# Altium PCB PCB1.PcbDoc (part 5 of 12)
Units mm, origin at the board's own origin, x right, y up, seen from the top; angles counter-clockwise.
Board outline 100 x 100 mm, 6 copper layers (Top Layer, Int1 (GND), Int2 (Sign), Int3 (Sign), Int4 (PWR), Bottom Layer), stack 1.538 mm thick; 614 components, 712 nets, 3014 pads, 1096 vias.
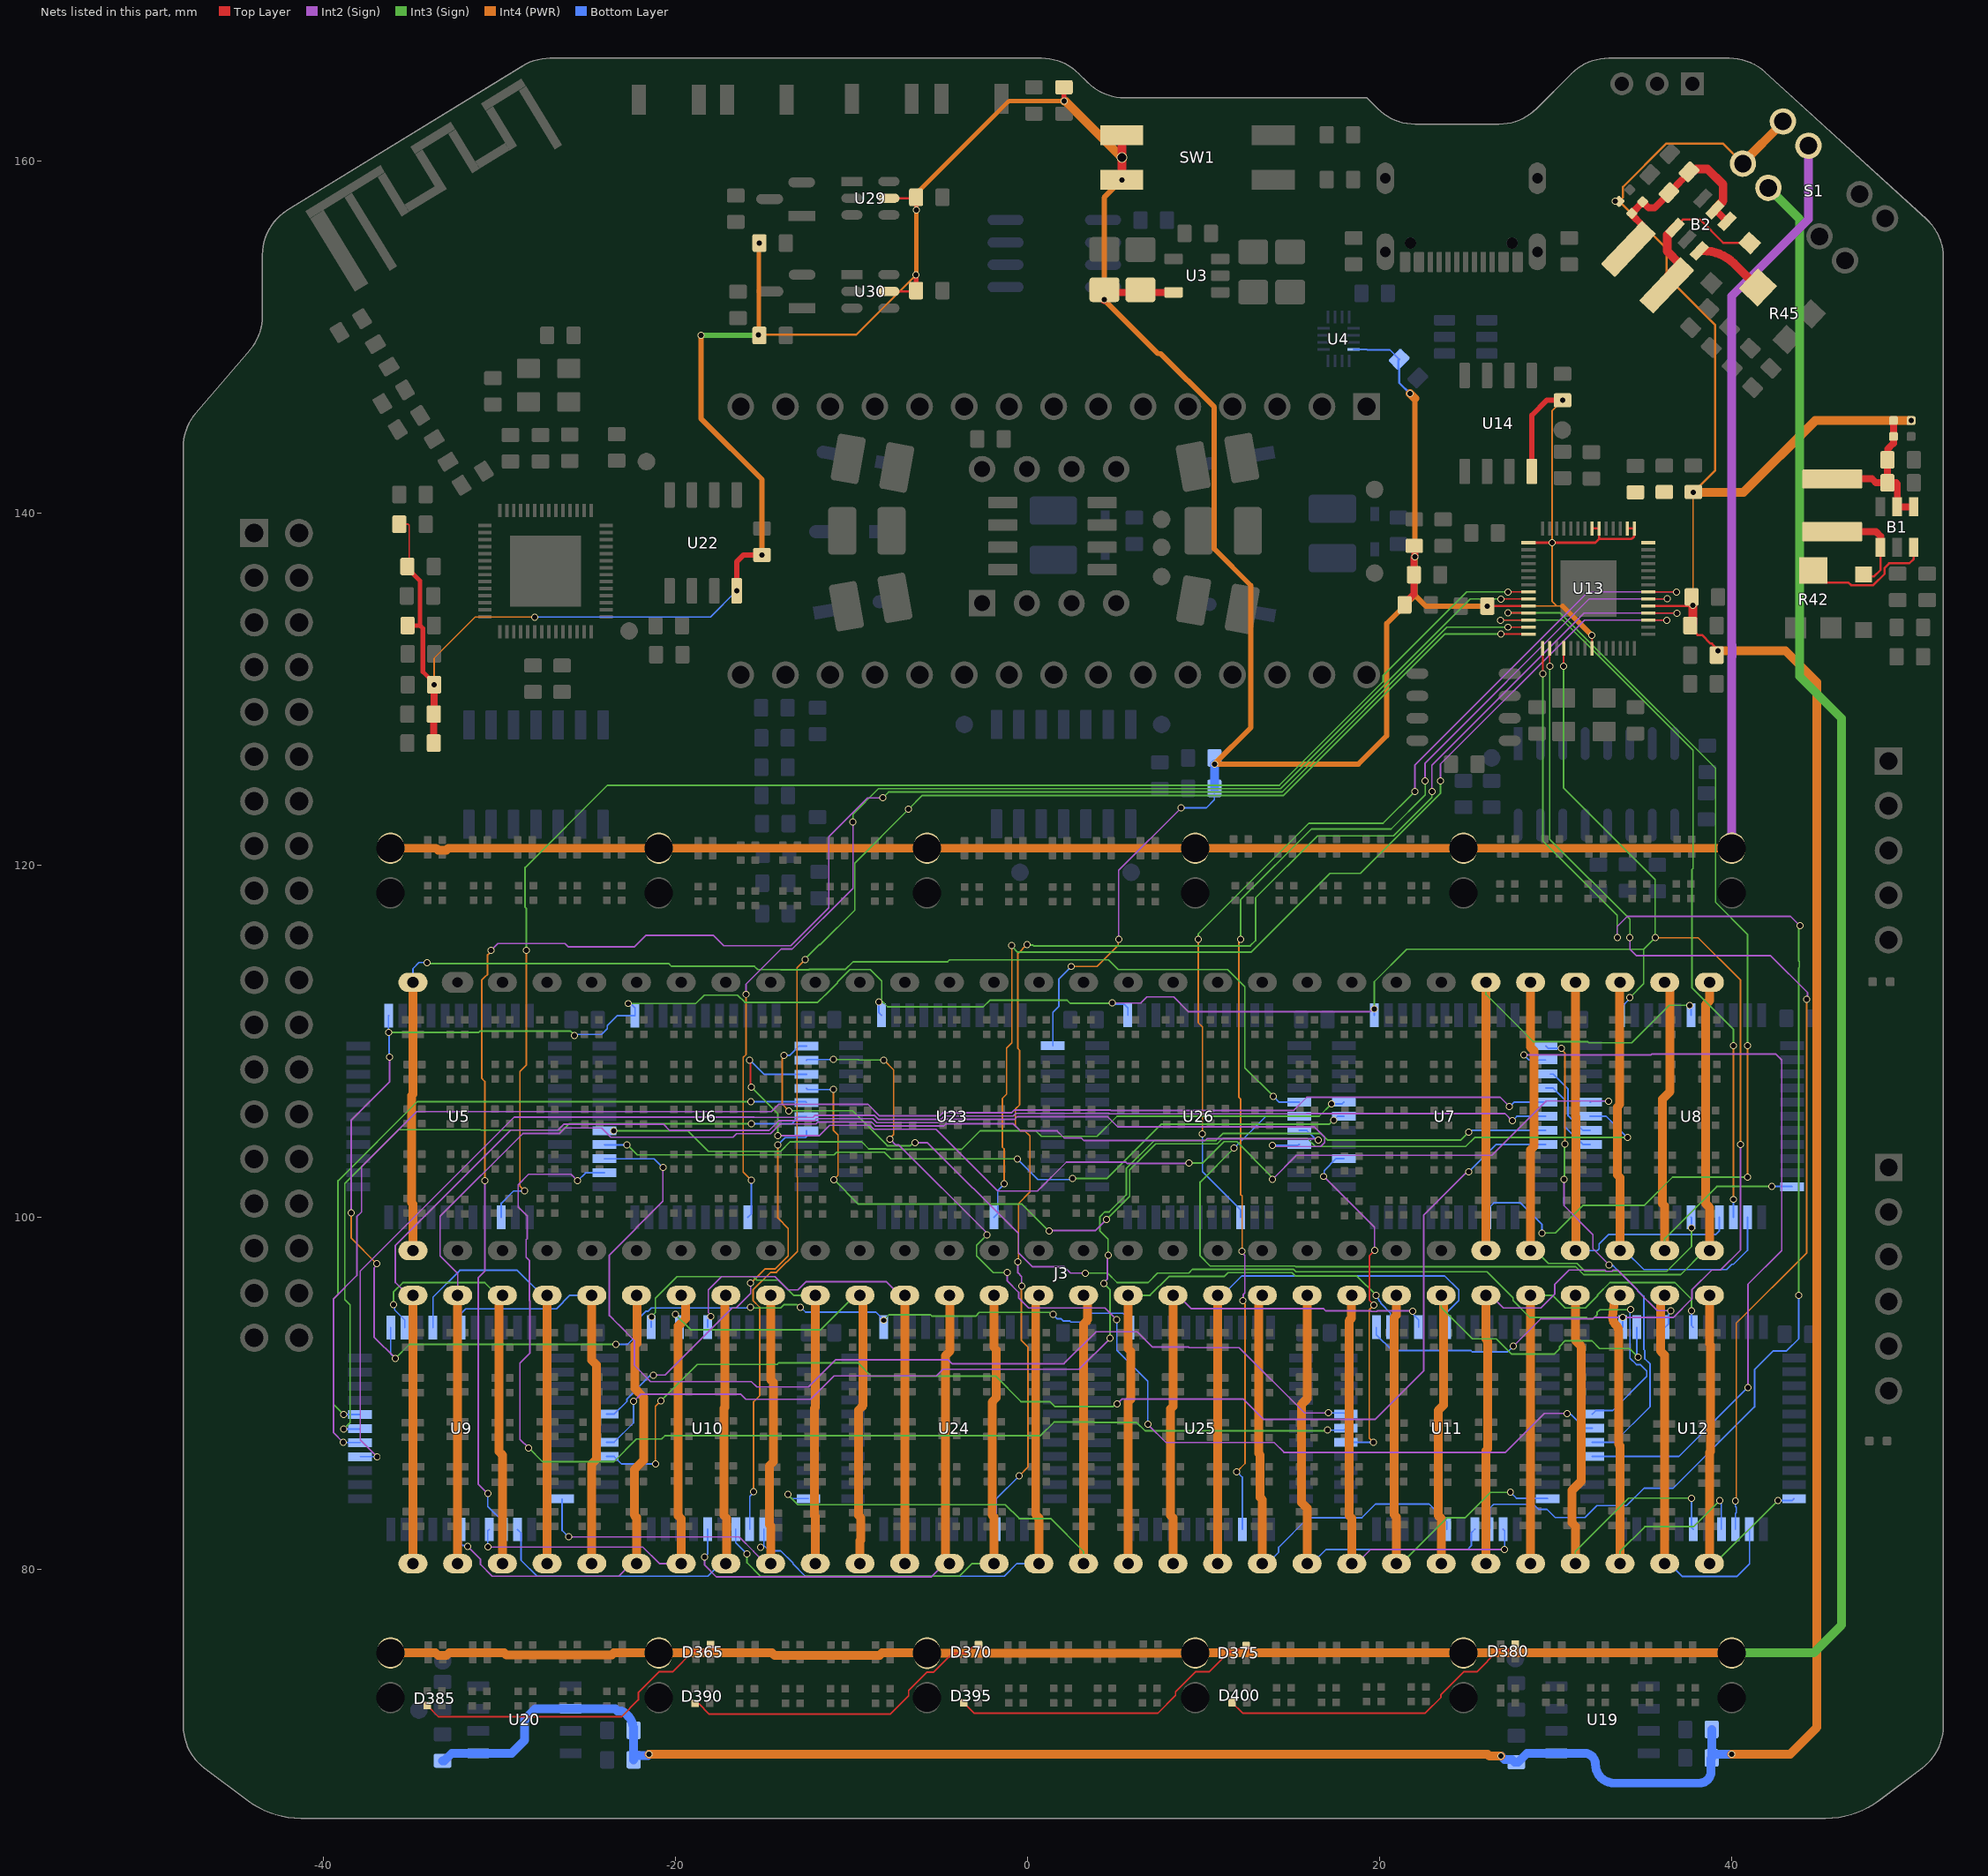
[diagram p8: the nets of this part, all layers, seen from the top]

## Via types
v1: diameter 0.4, hole 0.3, Top Layer to Bottom Layer, tented both sides, 1087 vias
v2: diameter 0.4, hole 0.3, Top Layer to Bottom Layer, 6 vias
v3: diameter 0.4, hole 0.3, Top Layer to Bottom Layer, tented top, 2 vias
v4: diameter 0.6, hole 0.5, Top Layer to Bottom Layer, 1 vias

## Nets (pads, with @x,y where several pads share a name; then routed paths per layer and width w, separated by ;. In a path a pad name is that pad's centre, name@x,y a point inside that pad or via, vN(x,y) a via of type N, cw(c..) or ccw(c..) an arc to the next point about the centre after c; other vN are vias at no path point) (continued)
B_B25: J3.25 U8.39 | length 30.1
  Int3 (Sign) w0.09: J3.25@26.028,113.356 26.028,112.671 28.714,109.984 31.814,109.984 31.877,109.922 34.307,109.922 36.437,112.051 v1(37.615,112.051)
  Int4 (PWR) w0.5: J3.25@26.028,98.116 J3.25@26.028,113.356
  Bottom Layer w0.09: v1(37.615,112.051) 37.687,111.979 U8.39@37.687,111.483
B_B26: J3.26 U8.17 | length 27.3
  Int3 (Sign) w0.09: J3.26@28.568,98.116 28.843,98.116 29.568,97.391 31.212,97.391 31.663,96.94 36.308,96.94 37.71,98.342 v1(37.71,99.407)
  Int4 (PWR) w0.5: J3.26@28.568,98.116 28.568,103.833 28.767,104.032 28.767,109.472 28.568,109.672 J3.26@28.568,113.356
  Bottom Layer w0.09: U8.17@37.687,100.013 37.71,99.99 v1(37.71,99.407)
B_B27: J3.27 U8.15 | length 24.9
  Int4 (PWR) w0.5: J3.27@31.108,98.116 31.134,98.143 31.134,105.723 31.108,105.749 J3.27@31.108,113.356
  Bottom Layer w0.09: J3.27@31.108,98.116 32.352,98.116 32.461,98.225 32.461,98.494 33.002,99.035 39.105,99.035 39.287,99.217 U8.15@39.287,100.013
B_B28: J3.28 U8.13 | length 25.4
  Int4 (PWR) w0.5: J3.28@33.648,98.116 33.648,102.26 33.493,102.415 33.493,106.281 33.626,106.415 33.626,113.334 J3.28@33.648,113.356
  Bottom Layer w0.09: J3.28@33.648,98.116 33.923,98.116 35.003,97.035 39.701,97.035 40.001,97.335 40.094,97.335 40.887,98.128 U8.13@40.887,100.013
B_B29: J3.29 U8.11 | length 24.8
  Int3 (Sign) w0.09: J3.29@36.188,98.116 36.188,98.801 39.144,101.757 v1(42.277,101.757)
  Int4 (PWR) w0.5: J3.29@36.188,98.116 36.188,100.65 36.062,100.776 36.062,106.715 36.487,107.14 36.487,113.079 36.21,113.356 J3.29@36.188,113.356
  Bottom Layer w0.09: v1(42.277,101.757) 43.412,101.757 U8.11@43.422,101.748
B_B33: J3.33 U9.35 | length 24.4
  Int3 (Sign) w0.09: v1(-36.03,95.04) -36.03,95.774 -35.506,96.298 -30.849,96.298 -30.127,95.576 J3.33@-29.852,95.576
  Int4 (PWR) w0.5: J3.33@-29.852,80.336 -29.852,86.506 -30.048,86.702 -30.048,95.38 J3.33@-29.852,95.576
  Bottom Layer w0.09: v1(-36.03,95.04) -35.971,94.981 -35.971,94.743 -35.395,94.168 U9.35@-35.395,93.743
B_B34: J3.34 U9.37 | length 24.7
  Int4 (PWR) w0.5: J3.34@-27.312,80.336 J3.34@-27.312,95.576
  Bottom Layer w0.09: U9.37@-33.795,93.743 -33.795,95.469 -32.269,96.995 -29.007,96.995 -27.587,95.576 J3.34@-27.312,95.576
B_B35: J3.35 U9.39 | length 24.1
  Int4 (PWR) w0.5: J3.35@-24.772,80.336 -24.772,85.994 -24.516,86.25 -24.516,91.631 -24.772,91.887 J3.35@-24.772,95.576
  Bottom Layer w0.09: U9.39@-32.195,93.743 -32.195,94.553 -31.94,94.809 -26.784,94.809 -26.016,95.576 J3.35@-24.772,95.576
B_B36: J3.36 U9.17 | length 27.8
  Int2 (Sign) w0.09: v1(-31.815,81.3) -31.091,80.576 -31.091,80.279 -30.426,79.614 -23.229,79.614 -22.507,80.336 J3.36@-22.232,80.336
  Int4 (PWR) w0.5: J3.36@-22.232,80.336 -22.232,82.952 -22.359,83.079 -22.359,85.672 -21.824,86.207 -21.824,89.783 -22.313,90.272 -22.313,92.727 -22.196,92.844 -22.196,95.539 J3.36@-22.232,95.576
  Bottom Layer w0.09: U9.17@-32.195,82.273 -32.195,81.457 -32.097,81.359 -31.875,81.359 v1(-31.815,81.3)
B_B37: J3.37 U9.15 | length 28
  Int2 (Sign) w0.09: v1(-30.679,81.274) -21.874,81.274 -20.936,80.336 J3.37@-19.692,80.336
  Int4 (PWR) w0.5: J3.37@-19.692,80.336 -19.692,82.883 -19.858,83.049 -19.858,93.83 -19.445,94.243 -19.445,95.329 J3.37@-19.692,95.576
  Bottom Layer w0.09: v1(-30.679,81.274) -30.679,82.189 U9.15@-30.595,82.273
B_B38: J3.38 U9.13 | length 29.5
  Int4 (PWR) w0.5: J3.38@-17.152,80.336 -17.112,80.377 -17.112,82.914 -17.266,83.069 -17.266,89.158 -17.214,89.21 -17.214,95.514 J3.38@-17.152,95.576
  Bottom Layer w0.09: U9.13@-28.995,82.273 -28.79,82.068 -28.79,80.518 -27.886,79.614 -18.18,79.614 -17.458,80.336 J3.38@-17.152,80.336
B_B39: J3.39 U9.11 | length 29.8
  Int2 (Sign) w0.09: v1(-26.095,81.848) -16.394,81.848 -15.58,81.034 -15.58,81.029 -14.887,80.336 J3.39@-14.612,80.336
  Int4 (PWR) w0.5: J3.39@-14.612,80.336 -14.612,82.481 -14.678,82.546 -14.678,85.892 -14.458,86.113 -14.458,90.628 -14.612,90.783 J3.39@-14.612,95.576
  Bottom Layer w0.09: U9.11@-26.46,84.008 -26.46,82.213 v1(-26.095,81.848)
B_B40: J3.40 U10.35 | length 27.1
  Int3 (Sign) w0.09: v1(-21.381,94.344) -21.381,94.368 -21.156,94.593 -21.156,95.408 -19.93,96.634 -15.594,96.634 -15.394,96.434 -14.174,96.434 -13.316,95.576 J3.40@-12.072,95.576
  Int4 (PWR) w0.5: J3.40@-12.072,80.336 -12.072,83.012 -12.129,83.069 -12.129,89.156 -12.072,89.212 J3.40@-12.072,95.576
  Bottom Layer w0.09: U10.35@-21.395,93.758 -21.395,94.33 v1(-21.381,94.344)
B_B41: J3.41 U10.37 | length 28
  Int3 (Sign) w0.09: v1(-20.022,94.482) -19.161,93.621 -11.762,93.621 -9.807,95.576 J3.41@-9.532,95.576
  Int4 (PWR) w0.5: J3.41@-9.532,80.336 -9.532,81.636 -9.5,81.669 -9.5,82.949 -9.62,83.069 -9.62,89.051 -9.353,89.317 -9.353,95.397 J3.41@-9.532,95.576
  Bottom Layer w0.09: v1(-20.022,94.482) -19.795,94.255 U10.37@-19.795,93.758
B_B42: J3.42 U10.39 | length 29.8
  Int2 (Sign) w0.09: v1(-18.004,94.365) -18.004,94.449 -18.149,94.594 -18.149,95.875 -17.39,96.634 -14.375,96.634 -13.62,95.88 -13.064,95.88 -12.593,96.351 -8.043,96.351 -7.267,95.576 J3.42@-6.992,95.576
  Int4 (PWR) w0.5: J3.42@-6.992,80.336 J3.42@-6.992,95.576
  Bottom Layer w0.09: U10.39@-18.195,93.758 -18.195,94.174 v1(-18.004,94.365)
B_B43: J3.43 U10.17 | length 32.1
  Int2 (Sign) w0.09: v1(-18.36,80.715) -18.36,80.247 -17.688,79.575 -5.488,79.575 -4.727,80.336 J3.43@-4.452,80.336
  Int4 (PWR) w0.5: J3.43@-4.452,80.336 -4.687,80.57 -4.687,92.14 -4.419,92.409 -4.419,94.232 -4.428,94.242 -4.428,95.552 J3.43@-4.452,95.576
  Bottom Layer w0.09: v1(-18.36,80.715) -18.195,80.88 U10.17@-18.195,82.288
B_B44: J3.44 U10.15 | length 32.3
  Int3 (Sign) w0.09: v1(-15.952,80.88) -15.952,80.379 -15.186,79.614 -3.878,79.614 -3.156,80.336 J3.44@-1.912,80.336
  Int4 (PWR) w0.5: J3.44@-1.912,80.336 -1.912,82.979 -2.03,83.097 -2.03,89.509 -1.788,89.751 -1.788,92.489 -1.912,92.614 J3.44@-1.912,95.576
  Bottom Layer w0.09: U10.15@-16.595,82.288 -16.595,81.523 v1(-15.952,80.88)
B_B45: J3.45 U10.13 | length 33.2
  Int4 (PWR) w0.5: J3.45@0.628,80.336 0.628,82.929 0.45,83.107 0.45,95.398 J3.45@0.628,95.576
  Bottom Layer w0.09: v1(-15.189,81.252) -15.105,81.252 -14.997,81.36 -14.995,81.36 ; U10.13@-14.995,82.288 -14.995,81.36 ; J3.45@0.628,80.336 -0.616,80.336 -1.338,79.614 -12.646,79.614 -13.342,80.31 -13.342,80.362 -14.038,81.058 -14.694,81.058 -14.995,81.36
B_B46: J3.46 U10.11 | length 35.5
  Int3 (Sign) w0.09: v1(-13.638,84.26) -13.058,83.68 -1.272,83.68 -0.486,82.894 1.294,82.894 3.168,81.021 J3.46@3.168,80.336
  Int4 (PWR) w0.5: J3.46@3.168,80.336 3.168,93.948 3.403,94.183 3.403,94.394 3.403,95.34 J3.46@3.168,95.576
  Bottom Layer w0.09: v1(-13.638,84.26) -13.401,84.023 U10.11@-12.46,84.023
B_B47: J3.47 U11.35 | length 32.7
  Int3 (Sign) w0.09: J3.47@5.708,95.576 6.952,95.576 8.018,96.643 11.157,96.643 11.377,96.863 15.018,96.863 15.211,96.67 18.702,96.67 v1(19.796,95.576)
  Int4 (PWR) w0.5: J3.47@5.708,80.336 5.708,89.529 5.839,89.66 5.839,92.414 5.708,92.545 J3.47@5.708,95.576
  Bottom Layer w0.09: v1(19.796,95.576) 19.796,95.492 19.951,95.337 19.951,95.277 20.046,95.181 20.046,95.126 20.605,94.568 U11.35@20.605,93.758
B_B48: J3.48 U11.37 | length 30.4
  Int2 (Sign) w0.09: J3.48@8.248,95.576 8.523,95.576 9.277,94.821 16.791,94.821 16.92,94.692 19.483,94.692 19.52,94.655 19.828,94.655 19.865,94.692 21.857,94.692 v1(21.871,94.678)
  Int4 (PWR) w0.5: J3.48@8.248,80.336 8.248,82.939 8.118,83.069 8.118,89.119 8.248,89.249 J3.48@8.248,95.576
  Bottom Layer w0.09: v1(21.871,94.678) 21.931,94.619 21.931,94.457 22.205,94.183 U11.37@22.205,93.758
B_B49: J3.49 U11.39 | length 32.1
  Int4 (PWR) w0.5: J3.49@10.788,80.336 J3.49@10.788,95.576
  Bottom Layer w0.09: J3.49@10.788,95.576 11.063,95.576 12.16,96.673 23.686,96.673 24.485,95.875 24.485,95.277 23.805,94.597 U11.39@23.805,93.758
B_B50: J3.50 U11.17 | length 28.3
  Int4 (PWR) w0.5: J3.50@13.328,80.336 13.328,83.976 13.202,84.102 13.202,86.509 13.114,86.597 13.114,95.362 J3.50@13.328,95.576
  Bottom Layer w0.09: J3.50@13.328,80.336 13.603,80.336 14.247,80.98 14.247,81.255 15.928,82.936 18.979,82.936 19.759,83.716 22.801,83.716 23.805,82.713 U11.17@23.805,82.288
B_B51: J3.51 U11.15 | length 26.3
  Int4 (PWR) w0.5: J3.51@15.868,80.336 15.868,83.48 15.563,83.785 15.563,89.389 15.868,89.694 J3.51@15.868,95.576
  Bottom Layer w0.09: J3.51@15.868,80.336 16.143,80.336 16.94,81.133 24.209,81.133 24.213,81.129 24.759,81.129 24.763,81.133 24.983,81.133 25.2,81.35 25.2,82.083 U11.15@25.405,82.288
B_B52: J3.52 U11.13 | length 25.6
  Int2 (Sign) w0.09: J3.52@18.408,80.336 18.683,80.336 19.48,81.133 24.209,81.133 24.213,81.129 24.759,81.129 24.763,81.133 27.09,81.133 v1(27.094,81.129)
  Int4 (PWR) w0.5: J3.52@18.408,80.336 18.408,82.909 18.248,83.069 18.248,94.13 18.394,94.276 18.394,95.562 J3.52@18.408,95.576
  Bottom Layer w0.09: U11.13@27.005,82.288 27.094,82.199 v1(27.094,81.129)
B_B53: J3.53 U11.11 | length 25.8
  Int3 (Sign) w0.09: J3.53@20.948,80.336 21.223,80.336 23.828,82.941 24.863,82.941 26.302,84.38 v1(27.421,84.38)
  Int4 (PWR) w0.5: J3.53@20.948,80.336 20.948,82.979 20.821,83.105 20.821,94.31 20.948,94.436 J3.53@20.948,95.576
  Bottom Layer w0.09: v1(27.421,84.38) 27.762,84.039 29.524,84.039 U11.11@29.54,84.023
B_B54: J3.54 U12.35 | length 31
  Int3 (Sign) w0.09: J3.54@23.488,95.576 23.488,94.891 25.272,93.106 26.627,93.106 27.5,92.233 29.906,92.233 30.222,92.549 30.222,92.676 30.539,92.993 32.047,92.993 32.488,92.552 34.188,92.552 v1(34.688,92.052)
  Int4 (PWR) w0.5: J3.54@23.488,80.336 23.488,82.899 23.313,83.074 23.313,89.033 23.619,89.339 23.619,95.445 J3.54@23.488,95.576
  Bottom Layer w0.09: U12.35@34.605,93.758 34.605,92.219 34.688,92.136 v1(34.688,92.052)
B_B55: J3.55 U12.37 | length 29.5
  Int2 (Sign) w0.09: J3.55@26.028,95.576 26.307,95.576 27.029,94.854 29.142,94.854 29.944,95.656 29.944,96.208 30.746,97.011 32.797,97.011 32.869,96.94 33.177,96.94 33.248,97.011 33.509,97.011 34.645,95.875 34.645,95.823 35.766,94.702 v1@36.529,94.702
  Int4 (PWR) w0.5: J3.55@26.028,80.336 26.028,86.739 26.136,86.847 26.136,92.973 26.028,93.082 J3.55@26.028,95.576
  Bottom Layer w0.09: U12.37@36.205,93.758 36.41,93.963 36.41,94.492 36.536,94.618 v1(36.536,94.702)
B_B56: J3.56 U12.39 | length 27.3
  Int3 (Sign) w0.09: J3.56@28.568,95.576 29.812,95.576 30.534,94.854 31.682,94.854 32.378,95.55 32.378,95.602 33.074,96.298 36.762,96.298 37.71,95.35 v1(37.71,94.695)
  Int4 (PWR) w0.5: J3.56@28.568,80.336 J3.56@28.568,95.576
  Bottom Layer w0.09: v1(37.71,94.695) 37.71,93.852 U12.39@37.805,93.758
B_B57: J3.57 U12.17 | length 26
  Int3 (Sign) w0.09: J3.57@31.108,80.336 31.108,81.021 34.136,84.049 v1(37.716,84.049)
  Int4 (PWR) w0.5: J3.57@31.108,80.336 31.108,82.466 30.926,82.648 30.926,84.501 31.455,85.029 31.455,92.675 31.108,93.022 J3.57@31.108,95.576
  Bottom Layer w0.09: v1(37.716,84.049) 37.716,82.376 U12.17@37.805,82.288
B_B58: J3.58 U12.15 | length 24.8
  Int3 (Sign) w0.09: J3.58@33.648,80.336 33.648,81.021 35.06,82.433 37.833,82.433 v1(39.305,83.904)
  Int4 (PWR) w0.5: J3.58@33.648,80.336 33.648,87.03 33.566,87.112 33.566,93.528 ccw(c33.066,93.528) 33.409,93.891 cw(c33.805,94.312) 33.232,94.379 33.373,95.576 J3.58@33.648,95.576
  Bottom Layer w0.09: v1(39.305,83.904) 39.305,83.82 39.405,83.72 U12.15@39.405,82.288
B_B59: J3.59 U12.13 | length 22.8
  Int4 (PWR) w0.5: J3.59@36.188,80.336 36.188,92.176 35.959,92.404 35.959,95.347 J3.59@36.188,95.576
  Bottom Layer w0.09: J3.59@36.188,80.336 36.463,80.336 37.199,79.6 40.278,79.6 41.005,80.327 U12.13@41.005,82.288
B_B60: J3.60 U12.11 | length 21.6
  Int3 (Sign) w0.09: J3.60@38.728,80.336 39.029,80.336 42.603,83.91 v1(42.63,83.91)
  Int4 (PWR) w0.5: J3.60@38.728,80.336 38.728,86.655 38.78,86.707 38.78,92.75 38.728,92.802 J3.60@38.728,95.576
  Bottom Layer w0.09: v1(42.63,83.91) 43.427,83.91 U12.11@43.54,84.023
BB_1_1: J3.1 U26.5 | length 73
  Int3 (Sign) w0.09: v1(-34.139,114.48) -34.087,114.428 -20.404,114.428 -20.244,114.268 -15.531,114.268 -15.341,114.078 -14.038,114.078 -14.036,114.076 -12.426,114.076 -12.405,114.098 -10.355,114.098 -9.934,114.519 -4.559,114.519 -4.448,114.63 4.586,114.63 5.139,114.078 11.362,114.078 12.331,113.109 12.331,108.5 v1(13.952,106.879)
  Int4 (PWR) w0.5: J3.1@-34.932,98.116 -34.932,100.769 -35.007,100.844 -35.007,106.924 -34.932,106.999 J3.1@-34.932,113.356
  Bottom Layer w0.09: J3.1@-34.932,113.356 -34.932,114.138 -34.59,114.48 v1(-34.139,114.48) ; v1(13.952,106.879) 14.283,106.548 U26.5@15.422,106.548
BB_30_1: J3.30 U26.6 | length 56.7
  Int3 (Sign) w0.09: v1(11.715,103.932) 9.791,102.008 9.791,97.817 10.364,97.243 15.176,97.243 15.218,97.201 31.133,97.201 31.584,96.75 37.086,96.75 38.453,98.116 J3.30@38.728,98.116
  Int4 (PWR) w0.5: J3.30@38.728,98.116 38.728,100.571 38.522,100.776 38.522,112.102 38.728,112.308 J3.30@38.728,113.356
  Bottom Layer w0.09: v1(11.715,103.932) 13.531,105.748 U26.6@15.422,105.748
BB_31_1: J3.31 U26.8 | length 80.4
  Int2 (Sign) w0.09: J3.31@-34.932,95.576 -35.207,95.576 -35.929,96.298 -35.929,98.415 -29.39,104.954 -26.698,104.954 -26.353,105.299 -20.702,105.299 -20.35,104.947 -14.699,104.947 -14.149,105.497 -12.117,105.497 -11.999,105.615 -8.809,105.615 -8.583,105.39 -4.844,105.39 -4.662,105.572 -0.749,105.572 -0.598,105.723 4.54,105.723 5.122,105.14 16.282,105.14 16.864,104.558 16.864,104.25 16.646,104.032 14.044,104.032 13.981,104.094 v1(13.897,104.094)
  Int4 (PWR) w0.5: J3.31@-34.932,80.336 J3.31@-34.932,95.576
  Bottom Layer w0.09: v1(13.897,104.094) 15.369,104.094 U26.8@15.422,104.148
BB_32_1: J3.32 U26.7 | length 74.6
  Int2 (Sign) w0.09: J3.32@-32.392,95.576 -32.392,96.82 -33.389,97.817 -33.389,100.064 -28.69,104.764 -26.62,104.764 -26.302,105.082 -24.207,105.082 -23.68,104.555 -16.756,104.555 -16.554,104.757 -14.62,104.757 -14.07,105.307 -12.038,105.307 -11.921,105.425 -8.887,105.425 -8.662,105.2 -4.765,105.2 -4.646,105.319 -0.824,105.319 -0.427,104.923 1.661,104.923 2.064,104.52 3.039,104.52 3.191,104.368 10.076,104.368 10.175,104.466 16.346,104.466 16.408,104.404 v1(16.492,104.404)
  Int4 (PWR) w0.5: J3.32@-32.392,80.336 J3.32@-32.392,95.576
  Bottom Layer w0.09: U26.7@15.422,104.948 15.847,104.948 16.332,104.463 16.433,104.463 v1(16.492,104.404)
BB_BOTTOM_RAIL_1: J3.63 S1.7 | length 166.8
  Int3 (Sign) w0.5: J3.63@39.998,75.256 44.656,75.256 46.237,76.837 46.237,128.357 43.855,130.738 43.855,156.72 S1.7@42.081,158.494
  Int4 (PWR) w0.5: J3.63@-36.202,75.256 -33.647,75.256 -33.503,75.112 -33.025,75.112 -32.88,75.256 -29.741,75.256 -29.631,75.146 -23.631,75.146 -23.521,75.256 -14.522,75.256 -14.389,75.123 -8.411,75.123 -8.278,75.256 -5.722,75.256 -5.716,75.249 9.511,75.249 J3.63@9.518,75.256 J3.63@39.998,75.256
BB_TOP_RAIL_1: J3.61 S1.3 | length 118
  Int2 (Sign) w0.5: J3.61@39.998,120.976 39.998,131.848 40.007,131.858 40.007,132.524 39.998,132.533 39.998,152.35 44.352,156.705 S1.3@44.352,160.888
  Int4 (PWR) w0.5: J3.61@-36.202,120.976 -33.621,120.976 -33.509,120.864 -33.031,120.864 -32.919,120.976 J3.61@-20.962,120.976 J3.61@-5.722,120.976 J3.61@9.518,120.976 J3.61@24.758,120.976 J3.61@39.998,120.976
BC0_3: U6.27 U7.29 | length 43.7
  Int3 (Sign) w0.09: v1(-23.526,104.927) -19.331,104.927 -18.157,103.753 -14.045,103.753 -13.5,104.298 -9.442,104.298 -9.038,103.894 -8.066,103.894 -8.041,103.869 -3.76,103.869 -2.706,104.923 0.457,104.923 0.771,104.609 3.935,104.609 5.073,105.747 16.555,105.747 v1(17.261,106.452)
  Bottom Layer w0.09: v1(17.261,106.452) 17.856,106.452 U7.29@17.952,106.548
BC1_3: U6.26 U7.28 | length 44.4
  Int3 (Sign) w0.09: v1(-22.763,104.125) -22.192,103.554 -10.998,103.554 -10.848,103.704 -8.144,103.704 -7.766,103.325 v1(-0.6,103.325) ; v1(2.535,102.218) 4.505,102.218 7.588,105.302 17.134,105.302 17.357,105.525 v1(17.384,105.525)
  Bottom Layer w0.09: U6.26@-24.048,104.133 -24.04,104.125 v1(-22.763,104.125) ; v1(-0.6,103.325) 0.572,102.153 2.385,102.153 2.451,102.218 v1(2.535,102.218) ; v1(17.384,105.525) 17.607,105.748 U7.28@17.952,105.748
BD0_3: U6.3 U8.29 | length 62.6
  Top Layer w0.09: v1(-15.796,108.94) -15.749,108.893 -15.749,107.438 v1(-15.702,107.391)
  Int2 (Sign) w0.09: v1(-14.199,104.652) -11.832,104.652 -11.249,105.235 -8.966,105.235 -8.741,105.01 -5.212,105.01 -1.705,101.503 0.552,101.503 2.192,103.143 5.57,103.143 5.64,103.073 9.137,103.073 v1(9.161,103.097) ; v1(13.897,102.161) 15.268,103.532 26.368,103.532 29.447,106.611 v1(33.006,106.611)
  Int3 (Sign) w0.09: v1(-15.702,107.391) -14.199,105.889 v1(-14.199,104.652) ; v1(9.161,103.097) 9.953,103.097 11.161,104.304 11.869,104.304 13.838,102.336 13.838,102.22 v1(13.897,102.161)
  Bottom Layer w0.09: v1(-15.796,108.94) -14.989,108.133 U6.3@-12.578,108.133 ; U8.29@31.952,106.548 32.016,106.611 v1(33.006,106.611)
BD1_3: U6.4 U8.28 | length 59.3
  Int2 (Sign) w0.09: v1(1.202,99.223) 1.231,99.252 3.837,99.252 v1(4.475,99.89)
  Int3 (Sign) w0.09: v1(-11.013,102.148) -9.62,100.755 -0.33,100.755 v1(1.202,99.223) ; v1(4.475,99.89) 5.786,101.201 5.786,102.693 7.27,104.178 10.765,104.178 11.082,104.494 15.876,104.494 16.338,104.032 24.877,104.032 25.387,104.542 v1(34.07,104.542)
  Int4 (PWR) w0.09: v1(-11.05,107.266) -11.05,104.958 -10.78,104.689 -10.78,102.388 -11.013,102.155 v1(-11.013,102.148)
  Bottom Layer w0.09: U6.4@-12.578,107.333 -12.511,107.266 v1(-11.05,107.266) ; U8.28@31.952,105.748 32.864,105.748 v1(34.07,104.542)
BE0_3: U6.5 U9.29 | length 43
  Int3 (Sign) w0.09: v1(-38.877,88.808) -39.437,89.368 -39.437,95.384 -39.188,95.633 -39.188,102.083 -34.695,106.576 v1(-15.736,106.576)
  Bottom Layer w0.09: v1(-38.877,88.808) U9.29@-37.93,88.808 ; v1(-15.736,106.576) -12.621,106.576 U6.5@-12.578,106.533
BE1_3: U6.6 U9.28 | length 43
  Int3 (Sign) w0.09: v1(-38.877,87.973) -38.505,88.345 -38.505,95.025 -38.808,95.329 -38.808,101.926 -35.746,104.988 -31.105,104.988 -31.071,104.954 -26.43,104.954 -26.064,105.319 v1(-15.702,105.319)
  Bottom Layer w0.09: v1(-38.877,87.973) -37.965,87.973 U9.28@-37.93,88.008 ; v1(-15.702,105.319) -13.416,105.319 -13.003,105.733 U6.6@-12.578,105.733
BF0_3: U6.7 U10.29 | length 23.2
  Int2 (Sign) w0.09: v1(-21.275,91.046) -20.598,91.046 -16.791,94.852 -16.58,94.852 -15.748,95.684 v1(-15.748,96.262)
  Int4 (PWR) w0.09: v1(-15.748,96.262) -14.941,97.069 -14.363,97.069 -13.615,97.817 -13.615,99.378 -14.199,99.962 v1(-14.199,104.125)
  Bottom Layer w0.09: U10.29@-23.93,88.823 -23.505,88.823 -22.773,89.556 -22.773,89.698 -21.484,90.987 -21.335,90.987 v1(-21.275,91.046) ; v1(-14.199,104.125) -13.796,104.528 -12.631,104.528 -12.578,104.581 U6.7@-12.578,104.933
BG0_3: U6.25 U11.29 | length 61
  Int2 (Sign) w0.09: v1(-20.73,102.829) -20.73,100.915 -23.775,97.869 -23.775,94.424 -23.278,93.927 -23.272,93.927 -22.351,93.006 -22.351,91.595 -21.429,90.674 -15.707,90.674 -15.403,90.37 -12.457,90.37 -10.911,91.916 -4.538,91.916 -4.31,91.688 2.064,91.688 3.881,93.506 6.213,93.506 7.075,92.644 9.126,92.644 9.165,92.605 12.015,92.605 15.726,88.895 v1(17.082,88.895)
  Bottom Layer w0.09: U6.25@-24.048,103.333 -21.234,103.333 v1(-20.73,102.829) ; v1(17.082,88.895) 17.998,88.895 U11.29@18.07,88.823
BG1_3: U6.24 U11.28 | length 69.2
  Int2 (Sign) w0.09: v1(-28.363,86.905) -28.853,87.395 -28.853,91.716 -28.297,92.272 -28.297,95.264 -28.309,95.277 -28.309,97.548 -28.499,97.738 -28.499,97.795 -28.499,98.733 -28.434,98.799 -28.434,100.069 -28.956,100.59 -28.956,101.86 -28.366,102.45 -25.954,102.45 v1(-25.582,102.078)
  Int3 (Sign) w0.09: v1(-28.363,86.905) -27.578,86.12 -23.522,86.12 -22.231,87.411 -20.803,87.411 -20.621,87.593 0.708,87.593 1.488,88.373 3.777,88.373 3.803,88.347 6.191,88.347 6.664,87.874 16.994,87.874 v1(17.035,87.915)
  Bottom Layer w0.09: v1(-25.582,102.078) -25.127,102.533 U6.24@-24.048,102.533 ; v1(17.035,87.915) 17.962,87.915 U11.28@18.07,88.023
BH0_3: U6.1 U12.29 | length 67.7
  Int2 (Sign) w0.09: v1(-6.417,104.241) -5.689,104.241 -0.533,99.085 -0.533,97.98 0.244,97.204 2.063,97.204 2.434,96.833 v1(3.271,96.833)
  Int3 (Sign) w0.09: v1(-13.58,106.059) -9.963,106.059 -7.979,104.076 -6.666,104.076 -6.501,104.241 v1(-6.417,104.241) ; v1(3.271,96.833) 4.539,96.833 5.074,96.298 6.839,96.298 7.373,96.833 9.138,96.833 9.358,97.053 15.097,97.053 15.241,96.909 26.092,96.909 27.571,95.431 27.571,95.277 28.536,94.312 31.745,94.312 31.814,94.242 32.122,94.242 32.34,94.46 32.34,94.599 32.501,94.76 v1(34.244,94.76)
  Int4 (PWR) w0.09: v1(-13.856,109.197) -13.856,109.113 -13.952,109.018 -13.952,106.431 v1(-13.58,106.059)
  Bottom Layer w0.09: v1(-13.856,109.197) -13.839,109.214 -13.521,109.214 -13.003,109.733 U6.1@-12.578,109.733 ; U12.29@32.07,88.823 32.275,89.028 33.231,89.028 35.167,90.964 35.167,91.272 34.801,91.638 34.576,91.638 34.21,92.004 34.21,94.726 v1(34.244,94.76)
BH1_3: U6.2 U12.28 | length 62.3
  Int2 (Sign) w0.09: v1(-7.825,104.448) -7.493,104.116 -7.322,104.116 -2.387,99.181 -2.387,99.053 v1(-2.328,98.994) ; v1(-1.173,96.864) -1.173,96.401 -0.518,95.747 -0.518,95.426 0.054,94.854 4.386,94.854 v1(5.057,94.183) ; v1(6.818,88.246) 7.856,87.208 13.998,87.208 14.551,86.655 27.145,86.655 29.355,88.865 v1(30.64,88.865)
  Int3 (Sign) w0.09: v1(-11.05,108.973) -9.626,108.973 -9.6,108.948 -8.184,108.948 v1(-8.176,108.94) ; v1(-2.328,98.994) -2.331,98.994 -2.909,98.415 -2.909,97.817 -1.957,96.864 v1(-1.173,96.864)
  Int4 (PWR) w0.09: v1(-8.176,108.94) -7.618,108.381 -7.618,104.714 -7.825,104.507 v1(-7.825,104.448)
  Bottom Layer w0.09: U6.2@-12.578,108.933 -12.537,108.973 v1(-11.05,108.973) ; v1(5.057,94.183) 5.057,92.447 6.818,90.686 v1(6.818,88.246) ; v1(30.64,88.865) 30.699,88.805 30.862,88.805 31.645,88.023 U12.28@32.07,88.023
BOTTOM1_RGB_OUT_8: D365.4 D385.1 | length 18.3
  Top Layer w0.09: D385.1@-34.111,72.262 -33.477,71.628 -23.087,71.628 -22.127,72.588 -22.127,73.005 -20.948,74.184 -20.184,74.184 -19.002,75.366 -18.441,75.366 -18.361,75.446 -18.306,75.446 D365.4@-18.026,75.726
BOTTOM2_RGB_OUT_8: D370.4 D390.1 | length 18
  Top Layer w0.09: D390.1@-18.71,72.393 -18.097,71.78 -7.827,71.78 -6.774,72.833 -6.774,73.118 -5.721,74.171 -5.34,74.171 -4.264,75.248 -3.483,75.248 -3.15,75.58 -2.936,75.58 D370.4@-2.799,75.718
BOTTOM3_RGB_OUT_8: D375.4 D395.1 | length 18
  Top Layer w0.09: D395.1@-3.63,72.416 -3.043,71.829 7.379,71.829 8.391,72.841 8.391,73.043 9.532,74.184 10.303,74.184 11.43,75.311 11.832,75.311 12.054,75.533 12.268,75.533 D375.4@12.406,75.671
BOTTOM4_RGB_OUT_8: D380.4 D400.1 | length 18.1
  Top Layer w0.09: D400.1@11.613,72.436 12.212,71.836 22.579,71.836 23.478,72.735 23.478,72.89 24.772,74.184 25.51,74.184 26.726,75.401 27.288,75.401 27.368,75.481 27.423,75.481 D380.4@27.703,75.761
BUCK1_3v3: C3.2 C4.2 C5.2 C7.2 C8.2 C9.2 C10.2 C11.2 C12.2 C14.2 C46.2 C48.2 C62.2 C63.2 C64.2 C70.2 C85.2 C86.2 JP1.2 JP3.2 L4.1 R1.1 R8.2 R9.2 R16.2 R17.2 R19.2 R20.2 R29.2 R30.2 R35.2 R36.2 R38.2 R39.2 R47.1 R49.1 S1.4 S1.8 SW1.3 SW1.4 U3.5 U4.4 U13.1 U13.10 U13.22 U13.33 U13.42 U13.43 U13.44 U13.48 U13.49 U14.8 U19.5 U20.2 U20.5 U22.8 U23.1 U29.5 U30.5 | length 453.1
  Top Layer w0.09: L4.1@-35.707,139.383 -35.198,139.383 -35.145,139.33 -35.145,137.085 R38.2@-35.248,136.983 ; U13.22@32.057,132.331 v1(32.057,133.065)
  Top Layer w0.127: U30.5@-7.894,152.608 -6.395,152.608 C86.2@-6.345,152.658 ; U29.5@-7.895,157.908 -6.395,157.908 C85.2@-6.345,157.958 ; C3.2@4.355,152.708 C3.2@4.505,152.558 ; v1(26.109,134.735) U13.10@28.453,134.735 ; U13.1@28.453,138.335 v1(29.796,138.335) 32.246,138.335 32.457,138.546 ; U13.49@32.057,139.138 U13.48@32.457,139.138 32.457,138.546 ; U13.44@34.057,139.138 U13.43@34.457,139.138 ; C7.2@34.457,141.129 C7.2@34.524,141.196 C7.2@34.532,141.188 ; U13.33@35.26,134.735 37.75,134.735 v1(37.783,134.768) ; C11.2@37.718,133.458 37.718,133.419 38.051,133.086 38.308,133.086 38.789,132.605 38.869,132.605 39.203,132.271 v1(39.203,132.191) ; 32.457,138.546 34.218,138.546 ; 34.218,138.546 ccw(c34.218,138.789) 34.461,138.789 cw(c34.218,138.789) 34.218,138.546
  Top Layer w0.254: R39.2@-35.241,133.627 -34.533,133.627 ; R38.2@-35.145,136.88 -35.145,136.78 -34.533,136.168 -34.533,133.627 ; v1(-33.728,130.263) -33.728,130.363 -34.368,131.004 -34.368,133.462 -34.533,133.627 ; C86.2@-6.345,152.658 v1(-6.345,153.558) ; C85.2@-6.345,157.958 -6.33,157.942 v1(-6.33,157.245) ; v1(2.055,163.435) R1.1@2.055,164.208
  Top Layer w0.3: v1(-16.54,135.602) -16.54,137.245 -16.145,137.64 v1(-15.105,137.64) ; U14.8@28.635,142.385 28.635,145.575 29.485,146.425 v1(30.381,146.425)
  Top Layer w0.4: C63.2@-33.748,126.948 C62.2@-33.748,128.596 -33.738,128.606 -33.738,130.253 v1(-33.728,130.263) ; C3.2@4.505,152.558 U3.5@8.28,152.558 ; R35.2@21.408,134.808 21.408,134.908 21.608,135.108 21.63,135.108 21.935,135.413 R36.2@21.935,136.513 21.945,136.522 21.945,137.471 v1(22,137.526) 22,138.113 R9.2@21.957,138.156
  Top Layer w0.5: R38.2@-35.248,136.983 R38.2@-35.145,136.88 ; v1(4.335,152.136) 4.335,152.688 C3.2@4.355,152.708 ; v1(5.339,158.949) v4(5.339,160.219) SW1.3@5.339,161.489 ; C11.2@37.638,133.625 37.783,133.769 v1(37.783,134.768)
  Int2 (Sign) w0.09: v1(5.167,115.8) 5.167,119.722 v1(8.715,123.27)
  Int3 (Sign) w0.3: v1(-18.555,150.108) -15.363,150.108 -15.321,150.15 v1(-15.294,150.15)
  Int4 (PWR) w0.09: v1(-33.728,130.263) -33.728,131.779 -31.398,134.109 v1(-28.004,134.109) ; v1(2.469,114.258) 3.936,114.258 5.139,115.461 5.139,115.772 v1(5.167,115.8) ; v1(26.109,134.735) 30.057,134.735 ; v1(30.381,146.425) 29.796,145.84 29.796,134.996 30.057,134.735 ; 30.386,134.735 30.057,134.735 ; v1(37.783,134.768) 37.799,134.784 37.799,141.184 v1(37.815,141.2)
  Int4 (PWR) w0.127: v1(-15.294,150.15) -9.754,150.15 v1(-6.345,153.558) ; v1(33.364,157.731) 33.595,157.731 ; v1(37.815,141.2) 39.06,142.445 39.06,150.687 36.301,153.446 36.301,155.025 33.595,157.731 ; S1.8@40.63,159.871 39.491,161.01 36.276,161.01 33.813,158.547 33.813,157.95 33.595,157.731
  Int4 (PWR) w0.254: v1(-15.294,150.15) -15.27,150.174 -15.27,155.333 v1(-15.245,155.358) ; v1(-6.345,153.558) -6.338,153.566 -6.338,157.237 v1(-6.33,157.245) -6.33,158.171 -1.067,163.435 v1(2.055,163.435)
  Int4 (PWR) w0.3: v1(-18.555,150.108) -18.555,145.373 -15.105,141.923 v1(-15.105,137.64) ; v1(5.339,158.949) 4.335,157.945 v1(4.335,152.136) 7.395,149.076 7.551,149.076 10.592,146.035 10.592,137.982 12.67,135.904 12.67,127.823 v1(10.605,125.758) 18.785,125.758 20.392,127.365 20.392,133.736 22,135.343 ; 22,146.525 22,135.343 ; v1(26.109,134.735) 22.608,134.735 22,135.343 ; 30.386,134.735 v1(32.057,133.065)
  Int4 (PWR) w0.5: v1(-21.525,69.495) 26.13,69.495 26.217,69.408 v1(26.87,69.408) ; v1(2.055,163.435) 2.123,163.435 v4(5.339,160.219) ; v1(21.72,146.805) 22,146.525 ; v1(37.815,141.2) 40.67,141.2 44.739,145.269 v1(50.183,145.269) ; v1(39.203,132.191) 43.051,132.191 44.835,130.406 44.835,100.716 44.831,100.712 44.831,71.021 43.318,69.508 v1(39.998,69.508) ; S1.8@40.63,159.871 40.63,159.932 42.902,162.204 S1.4@42.902,162.265
  Bottom Layer w0.09: v1(-28.004,134.109) -18.033,134.109 v1(-16.54,135.602) ; U23.1@1.422,109.748 1.422,111.649 1.772,111.999 1.772,113.561 v1(2.469,114.258) ; v1(8.715,123.27) 10.14,123.27 10.605,123.735 R29.2@10.605,124.38 ; U4.4@18.506,149.308 19.277,149.308 19.291,149.294 20.566,149.294 C5.2@21.102,148.758
  Bottom Layer w0.127: C5.2@21.102,148.758 21.045,148.701 21.045,148.229 21.102,148.172 21.102,147.423 v1(21.72,146.805) ; S1.8@40.63,159.871 S1.8@40.63,159.932 ; S1.4@42.902,162.204 S1.4@42.902,162.265
  Bottom Layer w0.5: C48.2@-33.245,69.136 -33.145,69.136 -32.729,69.553 U20.5@-31.22,69.553 -29.326,69.553 -28.582,70.297 -28.582,71.472 -27.961,72.093 U20.2@-25.97,72.093 -23.63,72.093 cw(c-23.63,70.858) -23.435,72.077 -23.319,71.962 -23.077,71.962 cw(c-23.63,70.858) R19.2@-22.395,70.858 R20.2@-22.395,69.286 ; R20.2@-22.395,69.186 R20.2@-22.395,69.286 ; v1(-21.525,69.495) -21.584,69.436 -22.245,69.436 R20.2@-22.395,69.286 ; R29.2@10.605,124.38 v1(10.605,125.758) ; v1(26.87,69.408) 27.077,69.201 27.505,69.201 27.655,69.051 C46.2@27.755,69.051 27.855,69.051 28.356,69.553 U19.5@30.03,69.553 31.637,69.553 cw(c31.637,68.94) 32.25,68.94 ccw(c33.33,68.94) 33.33,67.86 38.16,67.86 ccw(c38.16,68.52) 38.82,68.52 38.82,69.255 R17.2@38.855,69.29 ; R16.2@38.855,70.908 R17.2@38.855,69.29 ; v1(39.998,69.508) 39.005,69.508 38.855,69.358 R17.2@38.855,69.29
BUCK1_FB_11: B1.3 R42.2 | length 7.5
  Top Layer w0.127: R42.2@44.637,136.75 45.324,136.063 46.631,136.063 46.775,135.919 48.033,135.919 48.682,136.568 48.682,136.903 48.939,137.161 50.082,137.161 50.34,137.418 B1.3@50.34,138.075
BUCK1_SW_11: B1.1 D410.2 L5.1 | length 5.9
  Top Layer w0.127: D410.2@47.49,136.532 47.513,136.51 47.72,136.51 47.822,136.408 48.055,136.408 48.068,136.408 48.455,136.794 48.455,138.06 B1.1@48.44,138.075
  Top Layer w0.4: L5.1@45.705,138.958 48.195,138.958 48.455,138.698 48.455,138.09 B1.1@48.44,138.075
BUCK1_VIN_11: B1.4 B1.5 C79.2 C80.2 JP1.1 JP2.1 L5.2 | length 10.1
  Top Layer w0.4: L5.2@45.705,141.958 47.972,141.958 48.15,141.78 48.195,141.735 C80.2@48.84,141.735 ; JP1.1@49.183,145.269 JP2.1@49.183,144.369 49.183,143.983 48.855,143.655 48.855,143.055 C79.2@48.84,143.04 C80.2@48.84,141.735 ; B1.4@50.34,140.375 49.455,140.375 49.405,140.325 49.405,140.173 49.39,140.187 B1.5@49.39,140.375 49.405,140.39 49.405,141.661 49.33,141.735 C80.2@48.84,141.735
BUCK2_FB_11: B2.3 R45.2 | length 4.1
  Top Layer w0.5: B2.3@38.146,154.924 38.34,154.924 cw(c38.34,152.384) 40.136,154.18 R45.2@41.473,152.843
BUCK2_SW_11: B2.1 D411.2 L6.1 | length 9.2
  Top Layer w0.127: B2.1@36.768,156.232 37.234,156.698 38.182,156.698 39.503,155.377 40.997,155.377 D411.2@41.015,155.36 D411.2@41.014,155.242
  Top Layer w0.5: L6.1@36.305,152.958 36.305,153.364 36.437,153.497 36.437,153.576 37.039,154.177 36.325,154.891 36.325,155.834 36.328,155.834 36.727,156.232 B2.1@36.768,156.232
BUCK2_VIN_11: B2.4 B2.5 C83.2 C84.2 JP3.1 JP4.1 L6.2 | length 12.1
  Top Layer w0.4: L6.2@34.129,155.023 34.129,155.135 34.918,155.924 34.918,156.368 34.32,156.966 JP3.1@34.32,157.043 34.32,157.066 34.929,157.675 JP4.1@34.929,157.697 35.268,157.359 35.617,157.359 36.428,158.17 C83.2@36.428,158.22 ; C83.2@36.452,158.197 36.651,158.405 36.72,158.478 36.917,158.686 37.193,158.975 37.569,159.351 C84.2@37.569,159.412 ; B2.5@39.04,157.247 39.058,157.247 39.712,156.593 B2.4@39.729,156.593
  Top Layer w0.5: C84.2@37.569,159.412 37.795,159.412 37.954,159.57 38.619,159.57 39.503,158.686 39.503,157.75 39.04,157.287 B2.5@39.04,157.247
CD0_3: U7.3 U8.27 | length 4.5
  Bottom Layer w0.09: U7.3@29.684,108.146 29.849,108.146 30.697,107.298 30.697,105.778 31.527,104.948 U8.27@31.952,104.948
CD1_3: U7.4 U8.26 | length 4.7
  Bottom Layer w0.09: U7.4@29.422,107.348 29.847,107.348 30.507,106.688 30.507,105.168 31.527,104.148 U8.26@31.952,104.148
CE0_3: U7.5 U9.27 | length 87.3
  Int2 (Sign) w0.09: v1(-38.893,87.214) -39.437,87.758 -39.437,95.384 -38.12,96.7 -38.12,100.037 -37.848,100.309 -37.848,102.886 -34.72,106.014 -14.558,106.014 -14.141,106.431 -9.087,106.431 -8.426,105.77 -5.001,105.77 -4.819,105.952 -0.906,105.952 -0.755,106.103 4.697,106.103 4.721,106.079 15.107,106.079 15.853,106.824 26.843,106.824 v1(27.368,106.299)
  Bottom Layer w0.09: v1(-38.893,87.214) -37.936,87.214 U9.27@-37.93,87.208 ; v1(27.368,106.299) 27.617,106.548 U7.5@29.422,106.548
CE1_3: U7.6 U9.26 | length 83.4
  Int2 (Sign) w0.09: v1(-36.975,86.408) -37.93,87.363 -37.93,96.95 -29.183,105.698 -15.555,105.698 -15.544,105.687 -12.196,105.687 -12.078,105.805 -8.73,105.805 -8.505,105.58 -4.922,105.58 -4.74,105.762 -0.828,105.762 -0.676,105.913 4.618,105.913 4.643,105.889 15.836,105.889 15.844,105.897 27.121,105.897 v1(27.53,105.488)
  Bottom Layer w0.09: U9.26@-37.93,86.408 v1(-36.975,86.408) ; v1(27.53,105.488) 27.789,105.748 U7.6@29.422,105.748
CF0_3: U7.7 U10.27 | length 67.9
  Int2 (Sign) w0.09: v1(-22.401,89.544) -21.995,89.95 -16.292,89.95 -16.01,89.669 -12.336,89.669 -11.008,90.997 -5.189,90.997 -4.814,91.372 2.916,91.372 v1(4.678,93.134) ; v1(4.313,96.252) 4.313,96.3 4.527,96.513 4.527,97.822 v1(4.563,97.858)
  Int3 (Sign) w0.09: v1(4.313,96.252) 4.678,95.888 v1(4.678,93.134) ; v1(4.563,97.858) 4.563,98.763 4.103,99.223 4.103,100.044 4.373,100.314 4.624,100.314 5.596,101.286 5.596,102.772 7.191,104.368 10.686,104.368 11.094,104.776 16.646,104.776 17.024,104.398 24.607,104.398 v1(25.047,104.838)
  Bottom Layer w0.09: U10.27@-23.93,87.223 -23.505,87.223 -22.401,88.328 v1(-22.401,89.544) ; v1(25.047,104.838) 25.131,104.838 25.241,104.948 U7.7@29.422,104.948
CF1_3: U7.8 U10.26 | length 71.2
  Int2 (Sign) w0.09: v1(5.086,89.412) 5.358,89.685 12.238,89.685 13.4,88.523 19.732,88.523 22.491,91.282 22.491,100.114 24.896,102.519 24.988,102.519 v1(25.047,102.578)
  Int3 (Sign) w0.09: v1(-20.851,89.578) -18.778,91.651 -14.243,91.651 -14.154,91.741 -9.652,91.741 -8.894,90.982 -4.392,90.982 -4.388,90.986 -1.84,90.986 -0.39,89.537 1.259,89.537 1.545,89.251 4.84,89.251 5.002,89.412 v1(5.086,89.412)
  Int4 (PWR) w0.09: v1(-21.157,85.993) -21.157,89.271 v1(-20.851,89.578)
  Bottom Layer w0.09: U10.26@-23.93,86.423 -23.505,86.423 -23.075,85.993 v1(-21.157,85.993) ; v1(25.047,102.578) 26.617,104.148 U7.8@29.422,104.148
CG0_3: U7.25 U11.27 | length 20.1
  Top Layer w0.09: v1(19.674,95.027) 19.405,95.297 19.405,97.825 v1(19.704,98.124)
  Int2 (Sign) w0.09: v1(16.812,102.327) 19.704,99.434 v1(19.704,98.124)
  Int4 (PWR) w0.09: v1(19.64,87.217) 19.402,87.455 19.402,94.755 v1(19.674,95.027)
  Bottom Layer w0.09: v1(16.812,102.327) 16.841,102.356 16.841,102.662 17.527,103.348 U7.25@17.952,103.348 ; U11.27@18.07,87.223 18.076,87.217 v1(19.64,87.217)
CH0_3: U7.1 U12.27 | length 27.7
  Int2 (Sign) w0.09: v1(30.464,102.153) 30.464,100.668 32.105,99.028 32.105,98.23 v1(33.023,97.312)
  Int3 (Sign) w0.09: v1(30.464,102.153) 30.491,102.18 30.491,104.143 v1(30.518,104.17)
  Int4 (PWR) w0.09: v1(30.317,109.612) 30.317,109.541 30.518,109.34 v1(30.518,104.17)
  Bottom Layer w0.09: U7.1@29.422,109.748 29.558,109.612 v1(30.317,109.612) ; U12.27@32.07,87.223 33.324,87.223 35.357,89.255 35.357,91.665 35.06,91.961 35.06,92.44 35,92.5 35,95.52 33.267,97.252 33.082,97.252 v1(33.023,97.312)
CH1_3: U7.2 U12.26 | length 46
  Int2 (Sign) w0.09: v1(28.19,109.233) 35.397,109.233 35.441,109.276 42.512,109.276 42.839,108.949 42.839,98.123 40.916,96.2 v1(40.916,90.34)
  Bottom Layer w0.09: v1(28.19,109.233) 28.475,108.948 U7.2@29.422,108.948 ; U12.26@32.07,86.423 36.999,86.423 v1(40.916,90.34)
CH446_CLK: U5.34 U6.34 U7.34 U8.34 U9.34 U10.34 U11.34 U12.34 U13.18 U23.34 U24.34 U25.34 U26.34 | length 220.3
  Top Layer w0.09: v1(30.446,131.31) 30.446,132.32 U13.18@30.457,132.331
  Int2 (Sign) w0.09: v1(-38.436,100.247) -38.436,105.537 -36.259,107.715 v1(-36.259,109.108) ; v1(-36.989,97.366) -36.989,97.282 -37.144,97.127 -37.144,93.206 v1(-35.929,91.991) ; v1(4.795,112.182) 6.416,112.182 6.759,112.525 8.297,112.525 9.132,111.69 19.443,111.69 19.603,111.85 v1(19.687,111.85) ; v1(27.583,92.683) 29.143,94.242 32.122,94.242 32.192,94.312 36.672,94.312 37.731,95.371 37.731,95.875 38.864,97.009 39.354,97.009 40.5,98.154 v1(40.5,104.133)
  Int3 (Sign) w0.09: v1(-36.322,110.505) -31.205,110.505 -31.119,110.59 -26.002,110.59 v1(-25.75,110.339) ; v1(-35.929,91.991) -35.131,92.79 v1(-23.403,92.79) ; v1(-22.71,112.153) -18.865,112.153 -18.384,112.634 -16.489,112.634 -16.075,112.221 -11.935,112.221 -11.522,112.634 -11.498,112.634 -10.802,113.33 -10.802,113.382 -10.106,114.078 -8.958,114.078 -8.304,113.423 v1@-8.304,112.307 ; v1(-15.748,94.889) -15.713,94.854 -14.038,94.854 -13.844,95.048 -13.14,95.048 -12.997,94.905 v1(-12.913,94.905) ; v1(-8.457,112.244) -8.398,112.303 -8.307,112.303 v1@-8.304,112.307 ; v1(-8.195,94.155) -7.884,94.466 -5.517,94.466 -5.439,94.388 -2.965,94.388 -2.749,94.603 1.227,94.603 1.348,94.482 v1(1.432,94.482) ; v1(4.795,112.182) 4.772,112.159 2.418,112.159 2.242,112.335 -2.163,112.335 -2.535,111.963 -7.96,111.963 v1@-8.304,112.307 ; v1(19.687,111.85) 19.687,113.391 21.536,115.24 34.995,115.24 ; v1(30.446,131.31) 30.446,124.387 35.645,119.188 v1(35.645,115.89) 34.995,115.24 ; v1(34.203,112.483) 34.995,113.275 34.995,115.24
  Int4 (PWR) w0.09: v1(-38.436,100.247) -38.436,98.814 v1(-36.989,97.366) ; v1(35.645,115.89) 38.086,115.89 40.5,113.476 v1(40.5,104.133)
  Bottom Layer w0.09: U5.34@-36.313,111.468 -36.322,111.458 -36.322,110.514 -36.291,110.482 -36.291,109.14 v1(-36.259,109.108) ; U9.34@-36.195,93.743 -36.195,92.257 v1(-35.929,91.991) ; v1(-25.75,110.339) -25.693,110.396 -24.226,110.396 -23.892,110.729 -23.892,110.892 -23.316,111.468 U6.34@-22.313,111.468 -22.313,111.893 -22.518,112.098 -22.655,112.098 v1(-22.71,112.153) ; v1(-23.403,92.79) -22.738,92.79 -22.195,93.333 -22.195,94.183 -21.714,94.664 -21.58,94.664 -21.39,94.854 -15.783,94.854 v1(-15.748,94.889) ; v1(-12.913,94.905) -12.624,94.617 -8.629,94.617 -8.195,94.183 v1(-8.195,94.155) ; v1(-8.457,112.244) -8.457,111.627 U23.34@-8.313,111.483 ; v1(1.432,94.482) 1.677,94.237 1.895,94.237 2.022,94.11 2.39,94.11 2.449,94.051 3.056,94.051 3.56,94.555 5.403,94.555 5.79,94.168 U25.34@5.79,93.743 ; v1(4.795,112.182) v1(4.795,112.182) 4.876,112.18 4.944,112.113 5.482,112.113 5.687,111.908 U26.34@5.687,111.483 ; U7.34@19.687,111.483 v1(19.687,111.85) ; U11.34@19.805,93.758 19.805,93.333 20.697,92.44 25.175,92.44 25.253,92.362 27.263,92.362 v1(27.583,92.683) ; U8.34@33.687,111.483 33.687,111.908 34.203,112.423 v1(34.203,112.483) ; U12.34@33.805,93.758 v1(33.805,94.312)
CH446_CS_A: U5.14 U13.8 | length 84.8
  Top Layer w0.09: v1(27.291,135.535) U13.8@28.453,135.535
  Int3 (Sign) w0.09: v1(-28.483,115.185) -28.483,117.536 -28.56,117.612 -28.56,119.879 -23.891,124.548 14.293,124.548 20.185,130.44 20.185,130.783 24.936,135.535 v1(27.291,135.535)
  Int4 (PWR) w0.09: v1(-28.584,101.503) -28.854,101.773 -28.854,108.294 -28.483,108.664 v1(-28.483,115.185)
  Bottom Layer w0.09: U5.14@-29.913,99.998 -29.913,100.808 -29.218,101.503 v1(-28.584,101.503)
CH446_CS_B: U6.14 U13.9 | length 69.6
  Top Layer w0.09: v1(26.875,135.135) U13.9@28.453,135.135
  Int2 (Sign) w0.09: v1(-16.007,112.679) -16.007,113.257 -14.017,115.247 -13.384,115.247 -9.932,118.698 v1(-9.932,122.47)
  Int3 (Sign) w0.09: v1(-9.932,122.47) -9.932,122.911 -8.486,124.358 14.371,124.358 25.148,135.135 v1(26.875,135.135)
  Int4 (PWR) w0.09: v1(-16.007,112.679) -16.007,109.255 -16.168,109.094 -16.168,102.577 v1(-15.702,102.111)
  Bottom Layer w0.09: U6.14@-15.913,99.998 -15.708,100.203 -15.708,101.298 -15.708,102.105 v1(-15.702,102.111)
CH446_CS_C: U7.14 U13.11 | length 58.3
  Top Layer w0.09: v1(27.294,134.344) 28.443,134.345 U13.11@28.453,134.335
  Int3 (Sign) w0.09: v1(27.294,134.344) 30.251,134.344 32.683,131.912 32.689,131.912 39.076,125.526 39.076,117.904 40.887,116.092 v1(40.887,109.748) ; v1(29.207,99.114) 29.972,99.114 31.536,100.678 35.022,100.678 36.634,102.289 v1(40.887,102.289)
  Int4 (PWR) w0.09: v1(40.887,102.289) v1(40.887,109.748)
  Bottom Layer w0.09: U7.14@26.087,100.013 26.087,100.438 26.482,100.833 27.997,100.833 29.207,99.623 v1(29.207,99.114)
CH446_CS_D: U8.14 U13.12 | length 43.1
  Top Layer w0.09: v1(26.862,133.935) U13.12@28.453,133.935
  Int3 (Sign) w0.09: v1(26.862,133.935) 30.392,133.935 32.604,131.722 32.611,131.722 37.802,126.531 37.802,119.829 37.731,119.759 37.731,113.057 40.087,110.7 v1(40.087,109.748)
  Int4 (PWR) w0.09: v1(40.087,101.023) v1(40.087,109.748)
  Bottom Layer w0.09: U8.14@40.087,100.013 v1(40.087,101.023)
CH446_CS_E: U9.14 U13.13 | length 103.5
  Top Layer w0.09: v1(27.281,133.535) U13.13@28.453,133.535
  Int2 (Sign) w0.09: v1(-30.849,102.078) -30.849,96.939 -31.227,96.561 -31.227,84.861 v1(-30.679,84.312) ; v1(-30.485,115.185) -30.113,115.557 -26.298,115.557 -26.119,115.377 -22.334,115.377 -21.68,116.032 -17.868,116.032 -17.274,115.437 -13.462,115.437 -11.307,117.592 -11.307,121.621 -9.093,123.836 v1(-8.242,123.836)
  Int3 (Sign) w0.09: v1(-8.242,123.836) -7.91,124.168 14.45,124.168 23.817,133.535 v1(27.281,133.535)
  Int4 (PWR) w0.09: v1(-30.849,102.078) -30.849,107.73 -31.028,107.909 -31.028,113.477 -30.849,113.655 -30.692,113.813 -30.692,114.917 -30.485,115.124 v1(-30.485,115.185)
  Bottom Layer w0.09: v1(-30.679,84.312) -30.679,83.582 -29.795,82.698 U9.14@-29.795,82.273
CH446_CS_F: U10.14 U13.14 | length 84.5
  Top Layer w0.09: v1(26.873,133.146) 26.878,133.14 28.448,133.14 U13.14@28.453,133.135
  Int3 (Sign) w0.09: v1(-12.659,114.638) -12.659,114.675 -11.829,115.506 -11.781,115.506 -9.833,117.454 -9.833,120.131 v1(-6.781,123.183) -5.986,123.978 14.529,123.978 23.703,133.152 26.867,133.152 v1(26.873,133.146)
  Int4 (PWR) w0.09: v1(-15.58,84.422) -15.58,89.525 -15.228,89.876 -15.228,94.896 -15.609,95.277 -15.609,95.875 -14.605,96.879 -14.284,96.879 -13.091,98.073 -13.091,102.275 -13.109,102.294 -13.109,114.188 v1(-12.659,114.638)
  Bottom Layer w0.09: U10.14@-15.795,82.288 -15.795,84.163 -15.58,84.379 v1(-15.58,84.422)
CH446_CS_G: U11.14 U13.15 | length 77.8
  Top Layer w0.09: v1(29.257,130.897) U13.15@29.257,132.331
  Int2 (Sign) w0.09: v1(33.489,115.89) 33.489,116.528 34.066,117.105 43.335,117.105 v1(43.875,116.565)
  Int3 (Sign) w0.09: v1(29.257,130.897) 29.257,121.399 33.489,117.167 v1(33.489,115.89) ; v1(43.808,95.576) 43.808,114.187 43.842,114.221 43.842,114.529 43.808,114.563 43.808,116.498 v1(43.875,116.565)
  Bottom Layer w0.09: U11.14@26.205,82.288 26.257,82.34 26.257,83.487 26.475,83.705 28.728,83.705 29.019,83.413 29.502,83.413 29.963,82.952 31.657,82.952 32.333,83.628 34.021,83.628 35.011,84.618 36.673,84.618 41.288,89.234 41.288,91.347 42.359,92.418 43.111,92.418 43.808,93.114 v1(43.808,95.576)
CH446_CS_H: U12.14 U13.16 | length 62.3
  Top Layer w0.09: v1(29.655,131.31) 29.657,131.312 U13.16@29.657,132.331
  Int2 (Sign) w0.09: v1(34.21,115.893) 34.21,115.24 34.58,114.87 42.21,114.87 44.305,112.775 44.305,112.442 v1(44.258,112.395)
  Int3 (Sign) w0.09: v1(29.655,131.31) 29.655,121.486 34.21,116.931 v1(34.21,115.893)
  Int4 (PWR) w0.09: v1(40.205,83.901) 40.257,83.954 40.257,93.992 44.258,97.993 v1(44.258,112.395)
  Bottom Layer w0.09: U12.14@40.205,82.288 40.205,83.174 40.256,83.225 40.256,83.533 40.205,83.584 v1(40.205,83.901)
CH446_CS_I: U13.31 U23.14 | length 63.2
  Top Layer w0.09: U13.31@35.26,133.935 v1(36.311,133.935)
  Int2 (Sign) w0.09: v1(23.445,124.808) 23.445,125.751 31.629,133.935 v1(36.311,133.935)
  Int3 (Sign) w0.09: v1(-0.906,115.454) -0.906,115.403 -0.571,115.068 12.685,115.068 17.163,119.546 18.908,119.546 23.445,124.083 v1(23.445,124.808)
  Int4 (PWR) w0.09: v1(-1.338,101.904) -1.338,103.887 -1.445,103.994 -1.445,106.764 -1.209,107.001 -1.209,109.624 -0.906,109.927 v1(-0.906,115.454)
  Bottom Layer w0.09: U23.14@-1.913,100.013 -1.708,100.218 -1.708,101.535 v1(-1.338,101.904)
CH446_CS_J: U13.32 U24.14 | length 84.2
  Top Layer w0.09: U13.32@35.26,134.335 v1(36.877,134.335)
  Int2 (Sign) w0.09: v1(-0.562,97.483) -0.562,96.857 -0.348,96.643 v1(-0.348,96.103) ; v1(22.965,124.2) 22.959,124.206 22.959,125.687 31.607,134.335 v1(36.877,134.335)
  Int3 (Sign) w0.09: v1(-0.045,115.507) -0.011,115.473 0.29,115.473 0.335,115.428 12.64,115.428 12.944,115.732 12.944,118.164 16.46,121.68 20.773,121.68 22.958,123.865 22.958,124.193 v1(22.965,124.2)
  Int4 (PWR) w0.09: v1(-0.562,97.483) -0.533,97.513 -0.533,100.786 0.122,101.441 0.122,104.631 -0.17,104.923 -0.427,104.923 -0.701,105.197 -0.701,106.157 -0.465,106.393 -0.465,109.497 -0.559,109.591 -0.559,114.993 v1(-0.045,115.507) ; v1(-0.483,85.32) 0.005,85.808 0.005,92.652 -0.369,93.026 -0.369,96.082 v1(-0.348,96.103)
  Bottom Layer w0.09: U24.14@-1.795,82.288 -1.795,83.152 -1.797,83.154 -1.797,84.006 v1(-0.483,85.32)
CH446_CS_K: U13.34 U25.14 | length 69.8
  Top Layer w0.09: U13.34@35.26,135.135 36.329,135.135 v1(36.334,135.14)
  Int2 (Sign) w0.09: v1(12.177,98.068) 12.177,97.984 12.331,97.831 12.331,95.705 12.237,95.611 12.237,95.285 v1(12.228,95.276) ; v1(22.581,124.807) 22.573,124.815 22.573,125.816 31.897,135.14 v1(36.334,135.14)
  Int3 (Sign) w0.09: v1(12.087,115.8) 12.087,118.037 16.116,122.066 20.641,122.066 22.581,124.006 v1(22.581,124.807)
  Int4 (PWR) w0.09: v1(11.877,85.556) 12.344,86.022 12.344,95.077 12.228,95.193 v1(12.228,95.276) ; v1(12.087,115.8) 12.087,115.716 11.999,115.628 11.999,106.819 12.087,106.731 12.087,101.303 12.177,101.213 v1(12.177,98.068)
  Bottom Layer w0.09: v1(11.877,85.556) 12.19,85.244 U25.14@12.19,82.273
CH446_CS_L: U13.35 U26.14 | length 54.8
  Top Layer w0.09: U13.35@35.26,135.535 36.865,135.535 v1(36.869,135.539)
  Int2 (Sign) w0.09: v1(22,124.206) 22,125.713 31.826,135.539 v1(36.869,135.539)
  Int3 (Sign) w0.09: v1(9.687,115.8) 9.687,116.118 15.963,122.394 20.187,122.394 v1(22,124.206)
  Int4 (PWR) w0.09: v1(9.687,115.8) 9.687,111.051 9.922,110.816 v1(9.922,104.74)
  Bottom Layer w0.09: v1(9.922,104.74) 9.922,102.603 12.087,100.438 U26.14@12.087,100.013